# Altium PCB Neon-Demon-revA.PcbDoc
Units mm, origin at the board's own origin, x right, y up, seen from the top; angles counter-clockwise.
Board outline 24.25 x 25.59 mm, 2 copper layers (Top Layer, Bottom Layer), stack 1.071 mm thick; 9 components, 8 nets, 39 pads, 0 vias.
Unrouted connection lines stored in the file: 15.
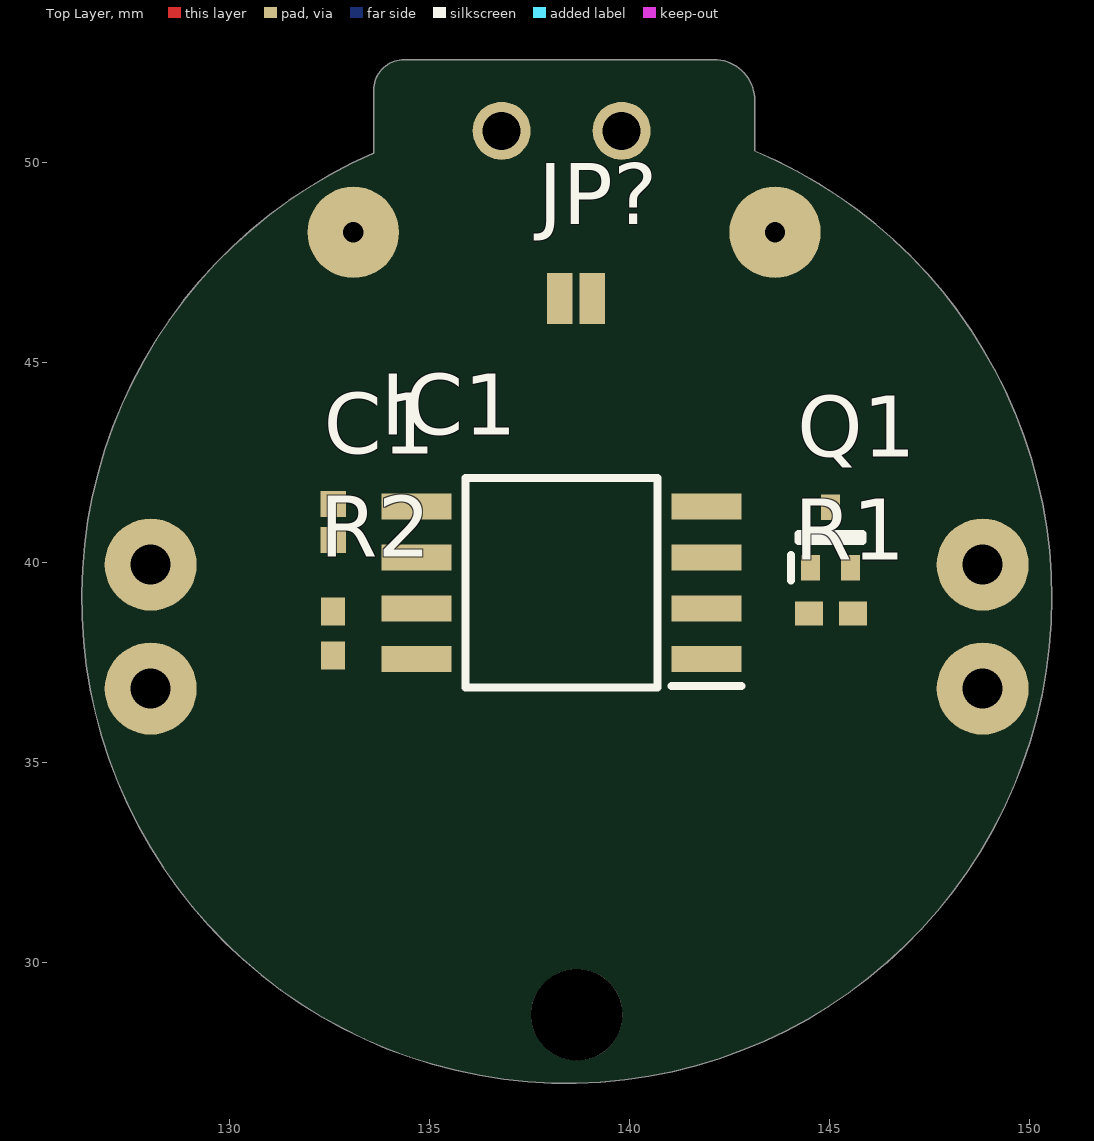
[diagram p0: Top Layer view]
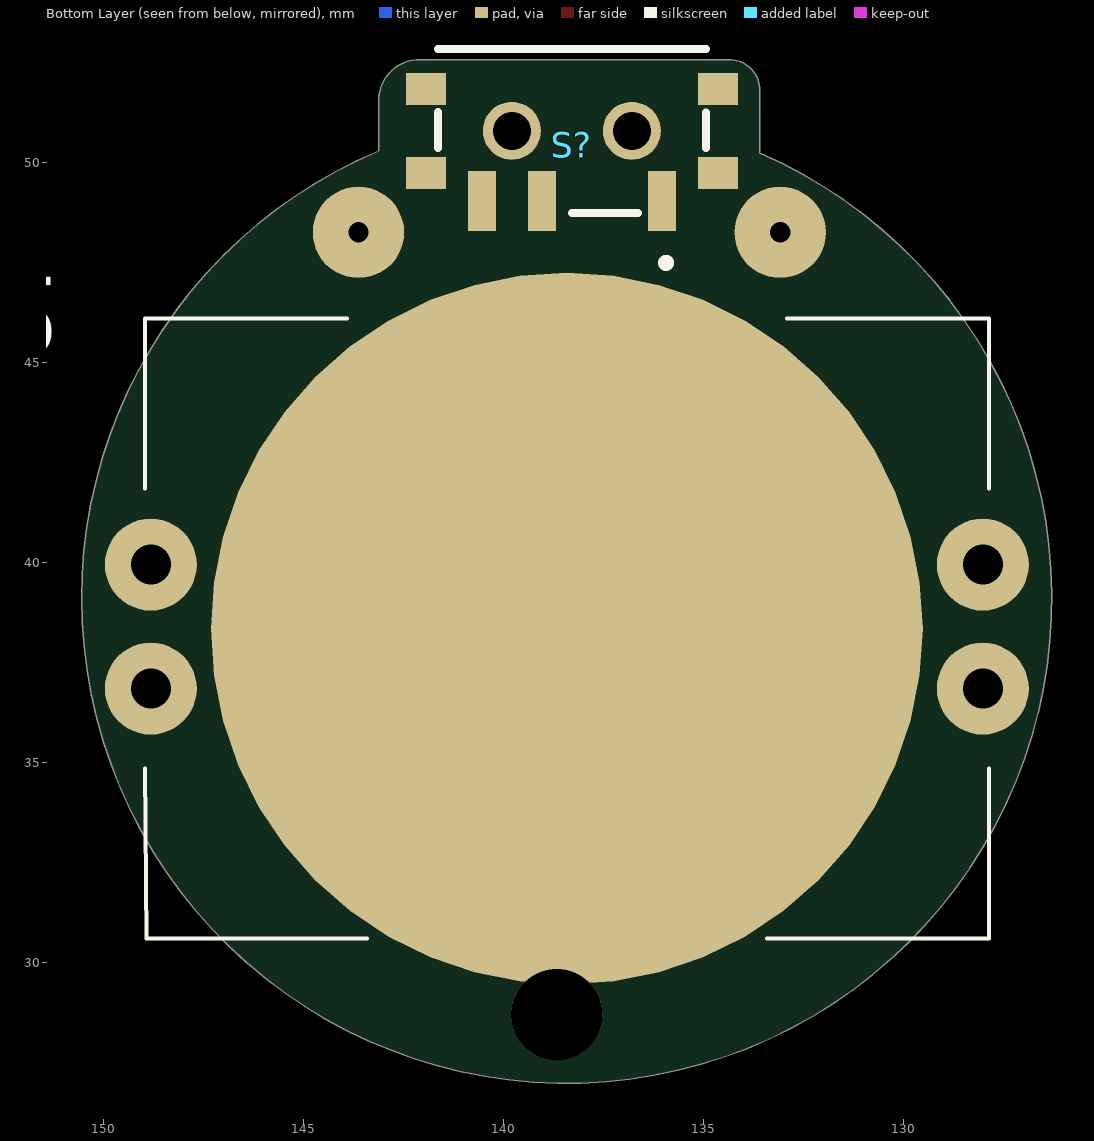
[diagram p1: Bottom Layer view, seen from below]

## Layer stack, top to bottom
Top Solder: solder mask 0.0102, Solder Resist, Dk 3.5
Top Layer: signal copper 0.0356
Dielectric 1: dielectric 1, FR-4, Dk 4.8
Bottom Layer: signal copper 0.0356
Bottom Solder: solder mask 0.0102, Solder Resist, Dk 3.5

## Board outline
133.604,50.242 ccw(c138.43,39.116) 150.557,39.116 ccw(c138.43,39.116) 143.129,50.296 143.129,51.562 ccw(c142.113,51.562) 142.113,52.578 134.366,52.578 ccw(c134.366,51.816) 133.604,51.816

## Design rules (kind name [scope] priority, off if disabled: settings)
Clearance [All] p1: gap=0.254 ignorepadtopadclearanceinfootprint=FALSE except(0: Arc-Hole Track-Hole SMDPad-Hole THPad-Hole Via-Hole Fill-Hole Poly-Hole Region-Hole Text-Hole)
PolygonConnect [All] p1: connectstyle=Relief reliefconductorwidth=0.254 reliefentries=4 polygonreliefangle="90 Angle" airgapwidth=0.254
RoutingVias [All] p1: holewidth=0.711 width=1.27 viastyle="Through Hole" minholewidth=0.711 minwidth=1.27 maxholewidth=0.711 maxwidth=1.27
SolderMaskExpansion [All] p1: expansion=0.102 istentingtop=FALSE
Width [All] p1: maxlimit=0.254 minlimit=0.254 preferedwidth=0.254
30 further rules are at their usual default settings.

## Components (designator, comment, footprint, x,y, rotation, side; value= is the part's Value field where it differs from the comment)
BT? "2899" 2899 55.505,42.418 r0 bottom
C1 "0402YC104MAT2A" CAPC1005X56N 132.588,41.021 r90 top
IC1 "ATTINY85-20SUR" SOIC127P798X216-8N 138.303,39.497 r180 top
JP? "Normally open jumper    This jumper has two pads in close proximity to each other. Apply solder to close the connection.   Round pads are easier to solder for beginners, but are a lot larger.   SparkFun Product that uses the round pads:  SparkFun EL Sequencer" SMT-JUMPER_2_NO_SILK 138.659,46.609 r0 top
Q1 "MMBT2222AT" SOTFL50P160X78-3N 145.026,40.633 r90 top
R1 "CPF0402B100KE" RESC1005X35N 145.034,38.735 r180 top
R2 "CPF0402B100KE" RESC1005X35N 132.588,38.227 r90 top
S? "CUS-12TB" CUS-12B 138.303,50.8 r0 bottom
U? "BAT-HLD-001-THM" BATHLD001THM 138.43,38.354 r0 bottom

## Footprints (in the part's own frame and the unit in brackets; to place one, negate y for a bottom-side part, rotate by r counter-clockwise, add the part's x,y. Pads: shape width x height; smd on the part's side, far side on the other; paste and mask are expansions set on the pad)
2899 [mm]
  round 2.775 hole 1.85: 1(0,0) 2(21.07,0)
  rect 3.96x3.96 smd: MP1(10.535,0)
  silkscreen extent -2.91,-0.05 -2.81,0.05, body extent -0.82,-10.54 21.9,10.54, height 3.53
BATHLD001THM [mm]
  round 2.3 hole 1: 1(-10.4,1.5) 2(-10.4,-1.6) 3(10.4,-1.6) 4(10.4,1.5)
  round 17.8 smd: 5(0,0)
  silkscreen extent -10.55,-7.75 10.55,7.75, body extent -10.54,-7.85 10.54,7.98, height 4.29
CAPC1005X56N [mm]
  rect 0.65x0.64 smd: 1(-0.45,0) 2(0.45,0)
  body extent -0.5,-0.25 0.5,0.25, height 0.56
CUS-12B [mm]
  rect 0.7x1.5 smd: 1(-2.25,1.75) 2(0.75,1.75) 3(2.25,1.75)
  rect 1x0.8 smd: 4(3.65,1.05) 5(3.65,-1.05) 6(-3.65,-1.05) 7(-3.65,1.05)
  round 1.45 hole 0.95: 8(-1.5,0) 9(1.5,0)
  silkscreen extent -3.35,-2.05 3.35,3.4, body extent -3.8,-2.78 3.88,2.21, height 1.47
RESC1005X35N [mm]
  rect 0.7x0.6 smd: 1(-0.55,0) 2(0.55,0)
  body extent -0.5,-0.25 0.5,0.25, height 0.35
SMT-JUMPER_2_NO_SILK [mil]
  rect 25x50 smd paste+0: 1(-16,0) 2(16,0)
SOIC127P798X216-8N [mm]
  rect 1.75x0.65 smd: 1(-3.625,1.905) 2(-3.625,0.635) 3(-3.625,-0.635) 4(-3.625,-1.905) 5(3.625,-1.905) 6(3.625,-0.635) 7(3.625,0.635) 8(3.625,1.905)
  silkscreen extent -4.5,-2.62 2.4,2.62, body extent -3.99,-2.62 3.99,2.62, height 2.16
SOTFL50P160X78-3N [mm]
  rect 0.63x0.48 smd: 1(-0.755,0.5) 2(-0.755,-0.5) 3(0.755,0)
  silkscreen extent -1.07,-0.8 0.09,0.99, body extent -0.8,-0.8 0.8,0.8, height 0.78

## Part data
BT?: "Battery", Manufacturer_Name="Keystone Electronics", Mouser Part Number=534-2899, Datasheet Link=https://www.mouser.com/datasheet/2/215/2899-1662518.pdf, Height=3.43mm, Manufacturer_Part_Number=2899, Mouser Price/Stock=https://www.mouser.co.uk/ProductDetail/Keystone-Electronics/2899?qs=u16ybLDytRaFFpZPrg8QEA%3D%3D
C1: "Capacitor", Manufacturer_Name=AVX, Mouser Part Number=581-0402YC104MAT2A, Datasheet Link=http://www.mouser.com/catalog/supplier/library/pdf/AVXSurfaceMountCeramic.pdf, Height=0.56mm, Manufacturer_Part_Number=0402YC104MAT2A, Mouser Price/Stock=https://www.mouser.co.uk/ProductDetail/AVX/0402YC104MAT2A?qs=O2%2FeDh0sX9yiCaLwpXy1bw%3D%3D
IC1: "Integrated Circuit", Manufacturer_Name=Microchip, Mouser Part Number=556-ATTINY85-20SUR, Arrow Part Number=ATTINY85-20SUR, Arrow Price/Stock=https://www.arrow.com/en/products/attiny85-20sur/microchip-technology?region=nac, Datasheet Link=http://ww1.microchip.com/downloads/en/DeviceDoc/Atmel-2586-AVR-8-bit-Microcontroller-ATtiny25-ATtiny45-ATtiny85_Datasheet.pdf, Height=2.16mm, Manufacturer_Part_Number=ATTINY85-20SUR, Mouser Price/Stock=https://www.mouser.co.uk/ProductDetail/Microchip-Technology/ATTINY85-20SUR?qs=6Dg1WZIWLC6UmR7J9f97hw%3D%3D
JP?: library part JUMPER-SMT_2_NO_SILK, Package=SMT-JUMPER_2_NO_SILK, DeviceName=_SILK, DeviceSetName=JUMPER-SMT_2_NO, GateName_1=G$1, LibraryName=SparkFun-Jumpers, SymbolName_1=SMT-JUMPER_2_NO
Q1: "Transistor BJT NPN", Manufacturer_Name=onsemi, Mouser Part Number=512-MMBT2222AT, Arrow Part Number=MMBT2222AT, Arrow Price/Stock=https://www.arrow.com/en/products/mmbt2222at/on-semiconductor, Datasheet Link=http://www.onsemi.com/pub/Collateral/MMBT2222ATT1-D.PDF, Height=0.78mm, Manufacturer_Part_Number=MMBT2222AT, Mouser Price/Stock=https://www.mouser.co.uk/ProductDetail/ON-Semiconductor-Fairchild/MMBT2222AT/?qs=olBtUnqRSekpPcGAXqyohQ%3D%3D
R1 R2: "Resistor", Manufacturer_Name="TE Connectivity", Mouser Part Number=279-CPF0402B100KE, Arrow Part Number=CPF0402B100KE, Arrow Price/Stock=https://www.arrow.com/en/products/cpf0402b100ke/te-connectivity?region=nac, Datasheet Link=http://www.farnell.com/datasheets/1786775.pdf, Height=0.35mm, Manufacturer_Part_Number=CPF0402B100KE, Mouser Price/Stock=https://www.mouser.co.uk/ProductDetail/TE-Connectivity-Holsworthy/CPF0402B100KE?qs=CXI0wBT1M2h4W2Gm72yIGA%3D%3D
S?: "Switch", Manufacturer_Name="Copal Electronics", Datasheet Link=http://www.nidec-copal-electronics.com/e/catalog/switch/cus.pdf, Manufacturer_Part_Number=CUS-12TB
U?: "Undefined or Miscellaneous", Manufacturer_Name="Linx Technologies", Mouser Part Number=712-BAT-HLD-001-THM, Datasheet Link="http://www.mouser.com/datasheet/2/238/BAT-HLD-001-THM Diagram-1175214.pdf", Height=4.2mm, Manufacturer_Part_Number=BAT-HLD-001-THM, Mouser Price/Stock=https://www.mouser.co.uk/ProductDetail/Linx-Technologies/BAT-HLD-001-THM?qs=Z0V%2FpEl%252BOGcluj3h2QTrDw%3D%3D

## Free pads (board coordinates)
  round 2.286 hole 0.508: 1(133.096,48.26) 1(143.637,48.26)
  round 2.286 hole 2.286 unplated: 1(138.684,28.702)

## Nets (pads, with @x,y where several pads share a name; then routed paths per layer and width w, separated by ;. In a path a pad name is that pad's centre, name@x,y a point inside that pad or via, vN(x,y) a via of type N, cw(c..) or ccw(c..) an arc to the next point about the centre after c; other vN are vias at no path point)
GND: C1.1 IC1.4 JP?.1 Q1.2 U?.5
LED_A: pad.1@133.096,48.26 S?.3
LED_K: JP?.2 pad.1@143.637,48.26 R2.2
NetQ1_1: Q1.1 R1.2
NetQ1_3: Q1.3 R2.1
PWM: IC1.5 R1.1
VBAT_CIRCUIT: C1.2 IC1.8
VBAT_RAW: S?.2 U?.1 U?.2 U?.3 U?.4
pads on no net: BT?.1 BT?.2 BT?.MP1 IC1.1 IC1.2 IC1.3 IC1.6 IC1.7 S?.1 S?.4 S?.5 S?.6 S?.7 S?.8 S?.9

## Silkscreen, mask and mechanical layers (free items; w line width, h text height)
Mechanical 1:
  lines w0.254: 133.259,51.601 cw(c133.259,51.637) 133.223,51.637 133.223,53.848 cw(c133.858,53.848) 133.858,54.483 142.621,54.483 142.875,54.483 cw(c142.875,53.975) 143.383,53.975 143.383,51.637
Board Shape:
  lines w0.254: 133.731,50.175 133.731,51.816 cw(c134.366,51.816) 134.366,52.451 134.62,52.451 142.113,52.451 cw(c142.113,51.562) 143.002,51.562 143.002,50.222 ccw(c143.021,50.222) 143.021,50.203 cw(c138.43,39.116) 133.759,50.17
Mechanical 7:
  lines w0.254: 129.153,35.157 127.353,35.157 cw(c127.353,36.024) 126.74,35.411 cw(c127.353,36.024) 126.486,36.024 126.486,36.3 126.486,40.364 cw(c127.756,40.364) 127.756,41.634 129.28,41.634 ; 129.295,35.153 ccw(c138.43,38.354) 147.57,35.169 ; 129.326,41.673 cw(c138.467,38.488) 147.602,41.689 ; 131.659,45.49 131.659,49.046 ; 145.034,45.593 145.034,49.149 ; 147.701,41.656 149.501,41.656 cw(c149.501,40.789) 150.114,41.402 cw(c149.501,40.789) 150.368,40.789 150.368,40.513 150.368,36.449 cw(c149.098,36.449) 149.098,35.179 147.574,35.179 ; 147.574,35.179 147.574,35.179
Mechanical 13:
  lines w0.254: 122.936,39.37 138.303,39.37 ; 138.303,24.003 138.303,39.37 ; 138.303,54.864 138.303,39.37 ; 153.797,39.37 138.303,39.37

## Dimensions
126.43,39.116 to 150.43,39.116 on Multi-Layer